# Altium PCB LiPo_1S_Protection_Circuit.PcbDoc
Units mm, origin at the board's own origin, x right, y up, seen from the top; angles counter-clockwise.
Board outline 14.3 x 4.28 mm, 2 copper layers (Top Layer, Bottom Layer); 5 components, 8 nets, 22 pads, 5 vias.
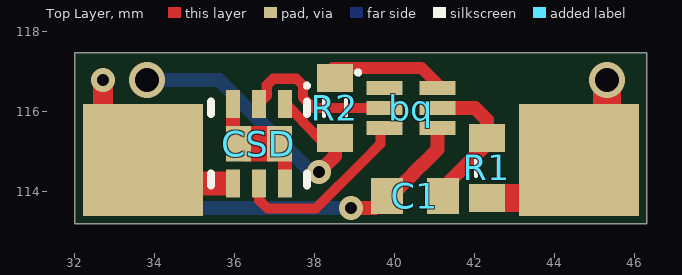
[diagram p0: Top Layer view]
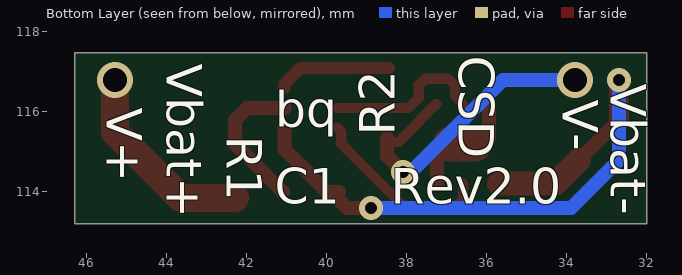
[diagram p1: Bottom Layer view, seen from below]
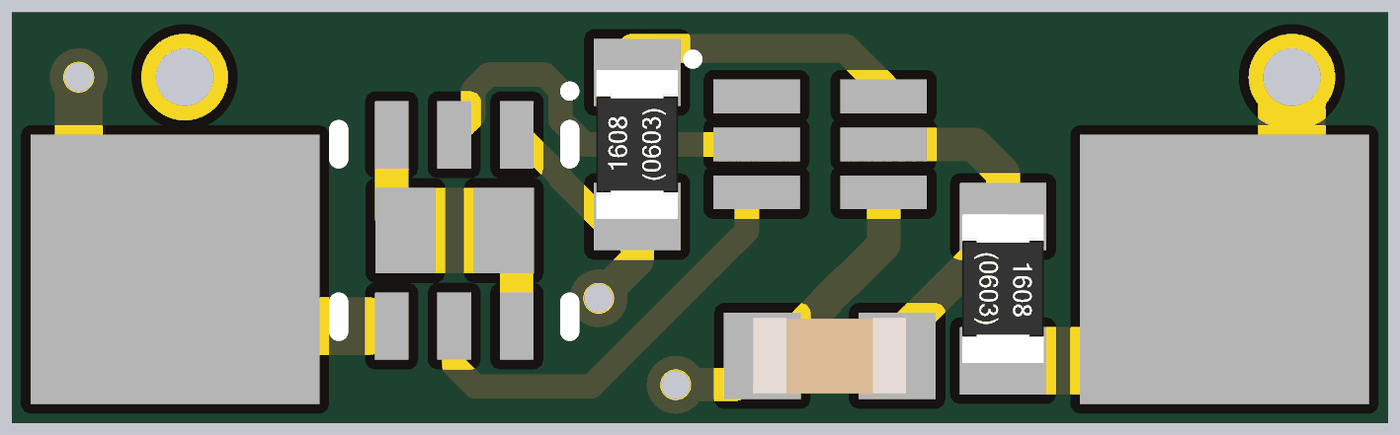
[diagram p2: 3D render of the assembled board from above, using the file's embedded part models]

## Layer stack, top to bottom
Top Solder: solder mask 0.0102, Solder Resist, Dk 3.5
Top Layer: signal copper 0.0356
Dielectric 1: dielectric 0.32, FR-4, Dk 4.8
Bottom Layer: signal copper 0.0356
Bottom Solder: solder mask 0.0102, Solder Resist, Dk 3.5

## Board outline
32,113.2 32,117.475 46.3,117.475 46.3,113.2

## Design rules (kind name [scope] priority, off if disabled: settings)
Clearance [All] p1: gap=0.15 ignorepadtopadclearanceinfootprint=FALSE except(0: Arc-Hole Track-Hole SMDPad-Hole THPad-Hole Via-Hole Fill-Hole Poly-Hole Region-Hole Text-Hole)
HoleSize [All] p1: absolutevalues=TRUE maxlimit=6.3 minlimit=0.3 maxpercent=80.000 minpercent=20.000
PolygonConnect [All] p1: connectstyle=Relief reliefconductorwidth=0.25 reliefentries=4 polygonreliefangle="90 Angle" airgapwidth=0.3
RoutingVias [All] p1: holewidth=0.3 width=0.6 viastyle="Through Hole" minholewidth=0.3 minwidth=0.6 maxholewidth=6.3 maxwidth=10.6
SolderMaskExpansion [All] p1: expansion=0.102
Width [All] p1: maxlimit=10 minlimit=0.15 preferedwidth=0.25
29 further rules are at their usual default settings.

## Classes and differential pairs
component class LiPo_1S_Protection_Circuit: bq C1 R1 R2

## Components (designator, comment, footprint, x,y, rotation, side; value= is the part's Value field where it differs from the comment)
bq "bq297XX" bq297xx 40.4,116.1 r0 top
C1 "Cap" "0603 Cap" 40.5,113.9 r0 top value=100n
CSD "CSD87502Q2" CSD87502Q2 36.6,115.205 r270 top
R1 "Res" "0603 Res" 42.3,114.6 r270 top value=330
R2 "Res" "0603 Res" 38.5,116.1 r90 top value=2K2

## Footprints (in the part's own frame and the unit in brackets; to place one, negate y for a bottom-side part, rotate by r counter-clockwise, add the part's x,y. Pads: shape width x height; smd on the part's side, far side on the other; paste and mask are expansions set on the pad)
"0603 Cap" [mm] "Chip Capacitor, Body 1.6x0.8mm, IPC High Density"
  rect 0.8x0.9 smd: 1(-0.7,0) 2(0.7,0)
  body extent -0.8,-0.4 0.8,0.4, height 0.78
"0603 Res" [mm] "Chip Resistor, Body 1.6x0.8mm, IPC High Density"
  rect 0.7x0.9 smd: 1(-0.75,0) 2(0.75,0)
  silkscreen extent -0.2,-0.28 0.2,0.28, body extent -0.78,-0.43 0.78,0.43, height 0.44
bq297xx [mm]
  rect 0.9x0.35 smd: 1(-0.66,0.5) 2(-0.66,0) 3(-0.66,-0.5) 4(0.66,-0.5) 5(0.66,0) 6(0.66,0.5)
  silkscreen extent -1.37,0.84 -1.27,0.94, body extent -0.78,-0.78 0.77,0.77, height 0.8
CSD87502Q2 [mm]
  rect 0.7x0.35 smd: 1(-0.995,0.65) 2(-0.995,0) 3(-0.995,-0.65) 4(0.995,-0.65) 5(0.995,0) 6(0.995,0.65)
  rect 0.89x0.625 smd: 7(0,-0.508) 8(0,0.515)
  silkscreen extent -1.5,-1.2 1.05,1.25, body extent -1.05,-1.05 1.05,1.05, height 0.8

## Free pads (board coordinates)
  rect 3x2.8 smd: 0(33.7,114.8) 0(44.6,114.8)

## Via types
v1: diameter 0.6, hole 0.3, Top Layer to Bottom Layer, tented both sides, 3 vias
v2: diameter 0.9, hole 0.6, Top Layer to Bottom Layer, 2 vias

## Nets (pads, with @x,y where several pads share a name; then routed paths per layer and width w, separated by ;. In a path a pad name is that pad's centre, name@x,y a point inside that pad or via, vN(x,y) a via of type N, cw(c..) or ccw(c..) an arc to the next point about the centre after c; other vN are vias at no path point)
Netbq_2: bq.2 CSD.2 | length 4
  Top Layer w0.254: CSD.2 36.798,116.398 36.798,116.665 36.96,116.827 37.54,116.827 37.702,116.665 37.702,116.356 37.958,116.1 bq.2
Netbq_3: bq.3 CSD.5 | length 4.7
  Top Layer w0.254: CSD.5 36.6,113.8 36.817,113.583 38.025,113.583 39.227,114.785 39.227,114.787 39.64,115.2 39.64,115.5 bq.3
Netbq_5: bq.5 C1.2 R1.1 | length 3.7
  Top Layer w0.35: bq.5 42,116.1 42.3,115.8 R1.1 42.3,115.2 C1.2@41.1,114
Netbq_6: bq.6 R2.2 | length 2.9
  Top Layer w0.3: R2.2@38.45,117.1 40.66,117.1 41.06,116.7 bq.6
NetCSD_3: CSD.3 CSD.6 CSD.7 CSD.8 | length 2.7
  Top Layer w0.35: CSD.3 35.95,115.347 36.121,115.277 CSD.7@36.3,115.205 ; CSD.6 CSD.8@37.25,115.07
  Top Layer w0.89: CSD.7@36.3,115.205 CSD.8@36.9,115.205
V+: pad.0@44.6,114.8 R1.2 | length 5
  Top Layer w0.7: R1.2 43.65,113.85 44.6,114.8 45.3,115.5 v2(45.3,116.8)
V-: CSD.1 R2.1 | length 7.9
  Top Layer w0.254: CSD.1 37.269,116.2 37.705,115.765 37.705,115.745 38.2,115.25 R2.1@38.5,115.25
  Top Layer w0.35: v1(38.1,114.5) 38.5,114.9 38.5,115.25 R2.1
  Bottom Layer w0.35: v2(33.8,116.8) 35.6,116.8 37.9,114.5 v1(38.1,114.5)
Vbat-: bq.4 C1.1 CSD.4 pad.0@33.7,114.8 | length 16.7
  Top Layer w0.35: pad.0@32.7,115.8 pad.0@33.7,114.8 ; v1(38.9,113.6) 39.5,113.6 C1.1 ; C1.1@39.7,114 40,114 40.475,114.475 40.475,114.485 40.665,114.675 40.675,114.675 41.06,115.06 bq.4
  Top Layer w0.5: pad.0@32.7,115.8 v1(32.7,116.8)
  Top Layer w0.6: pad.0@33.7,114.8 34.29,114.21 35.7,114.21
  Bottom Layer w0.35: v1(32.7,116.8) 32.7,114.8 33.9,113.6 v1(38.9,113.6)
pads on no net: bq.1

## Silkscreen, mask and mechanical layers (free items; w line width, h text height)
Bottom Overlay:
  text "Vbat+" at 44.3,117.2 h1.52 r90
  text "Vbat-" at 33.2,116.7 h1.52 r90
  text "V-" at 34.4,116.3 h1.52 r90
  text "V+" at 45.8,116.1 h1.52 r90
  text "Rev2.0" at 38.4,113.4 h1.52
Mechanical 1:
  the board outline again, w0.1